# Altium PCB TX_RasPi_Ext_PCB1.PcbDoc
Units mm, origin at the board's own origin, x right, y up, seen from the top; angles counter-clockwise.
Board outline 65 x 57 mm, 2 copper layers (Top Layer, Bottom Layer); 25 components, 25 nets, 103 pads, 14 vias.
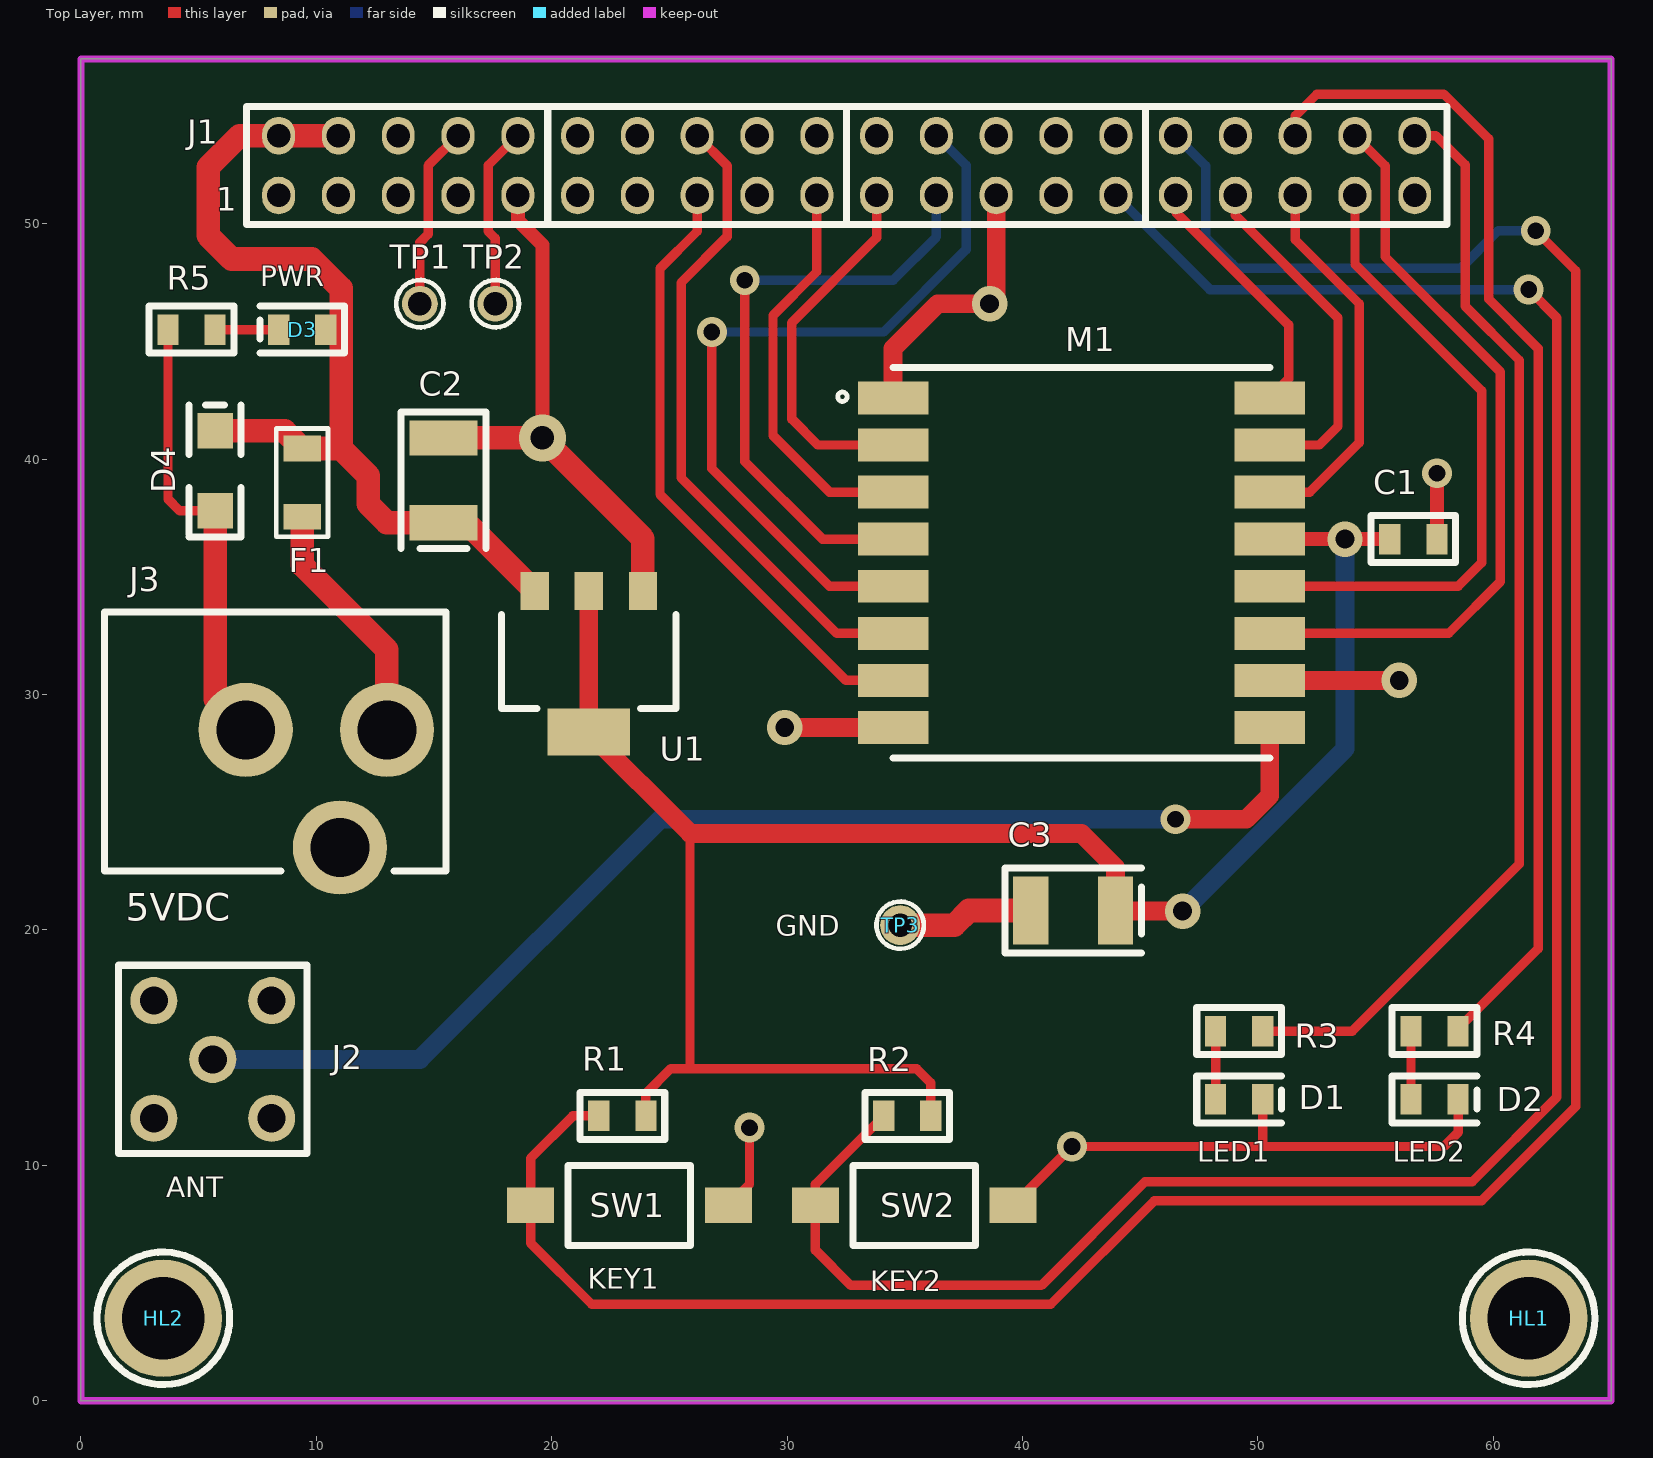
[diagram p0: Top Layer view]
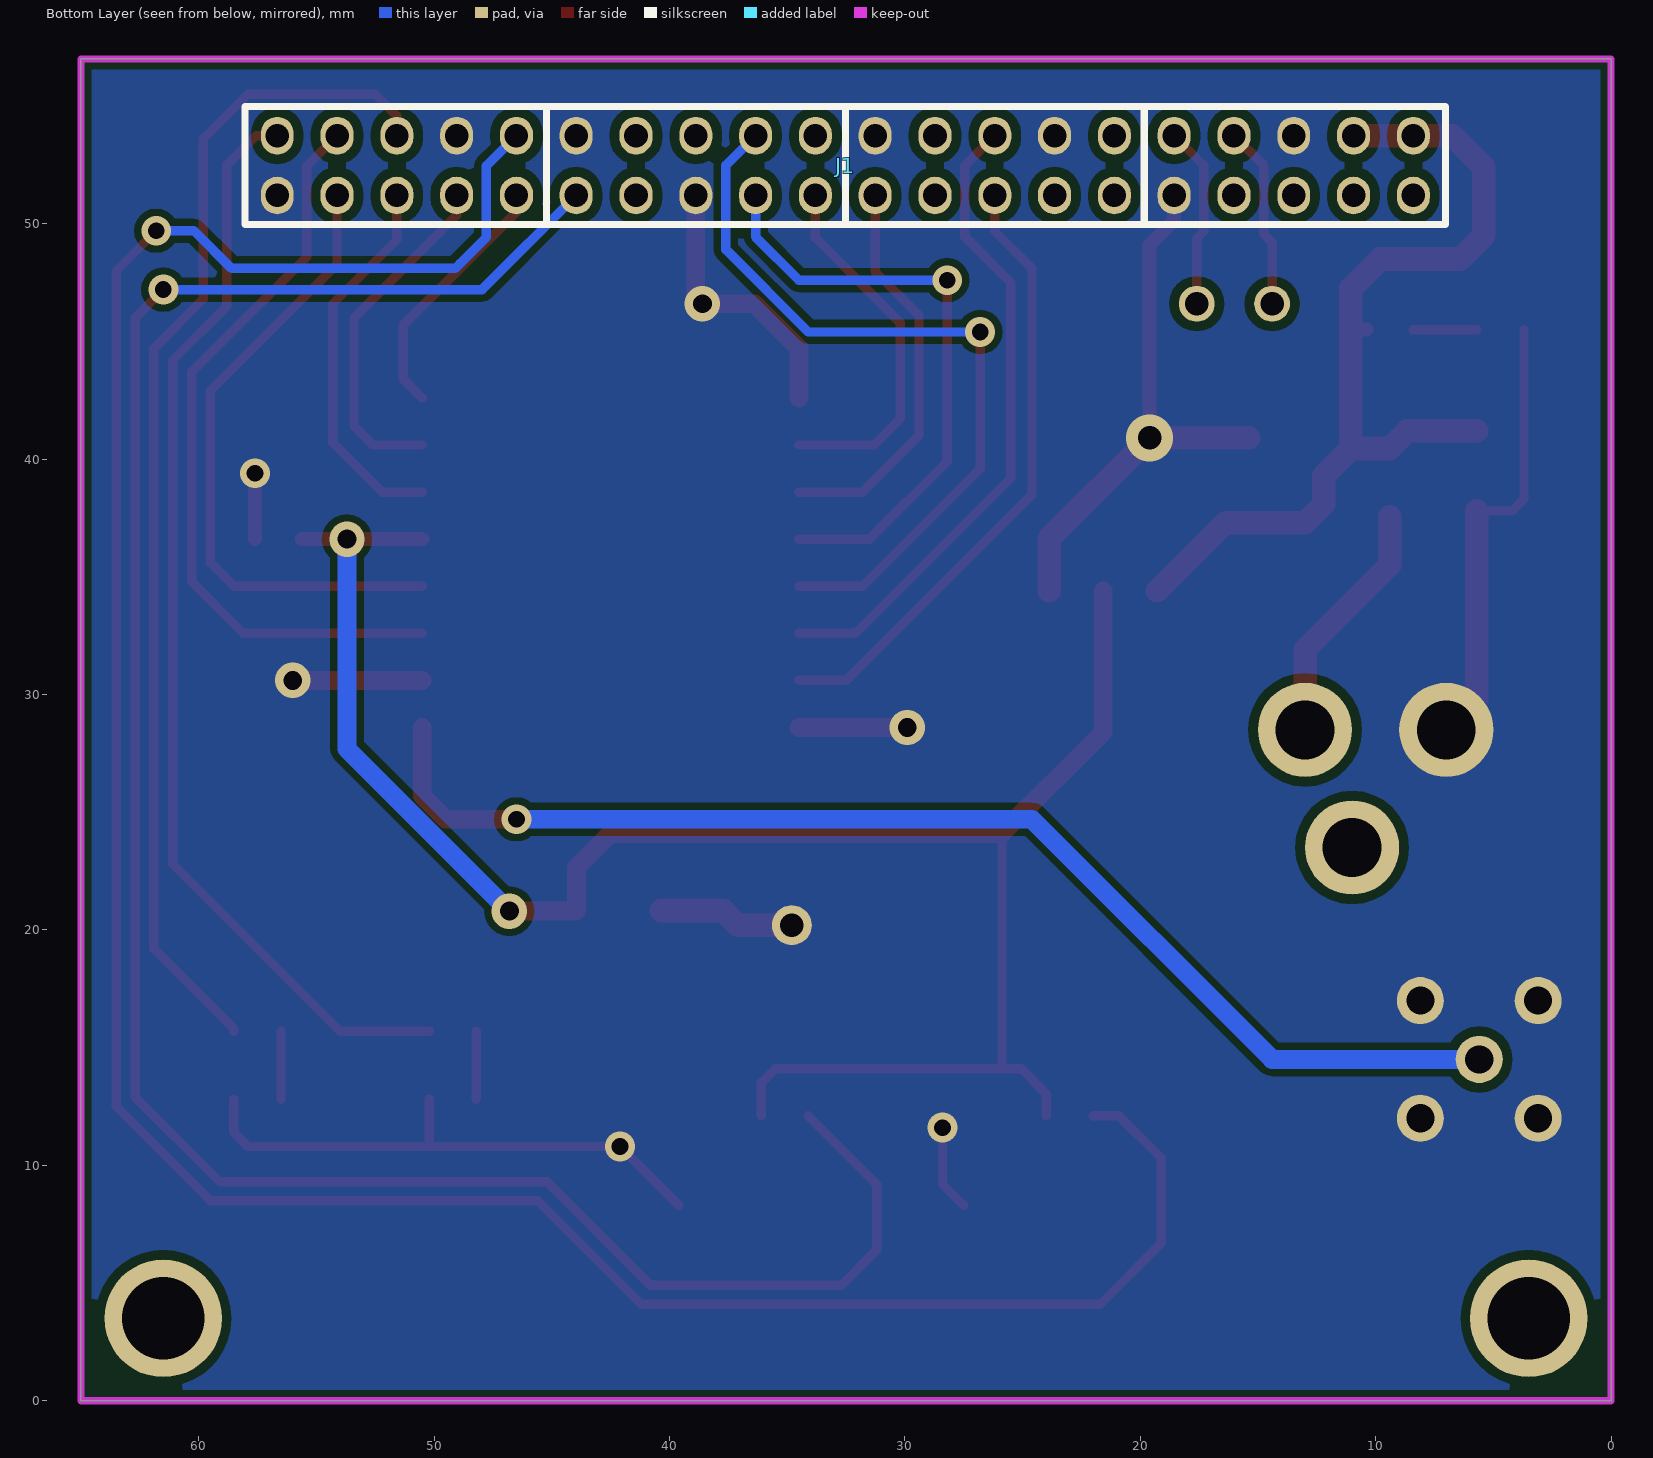
[diagram p1: Bottom Layer view, seen from below]
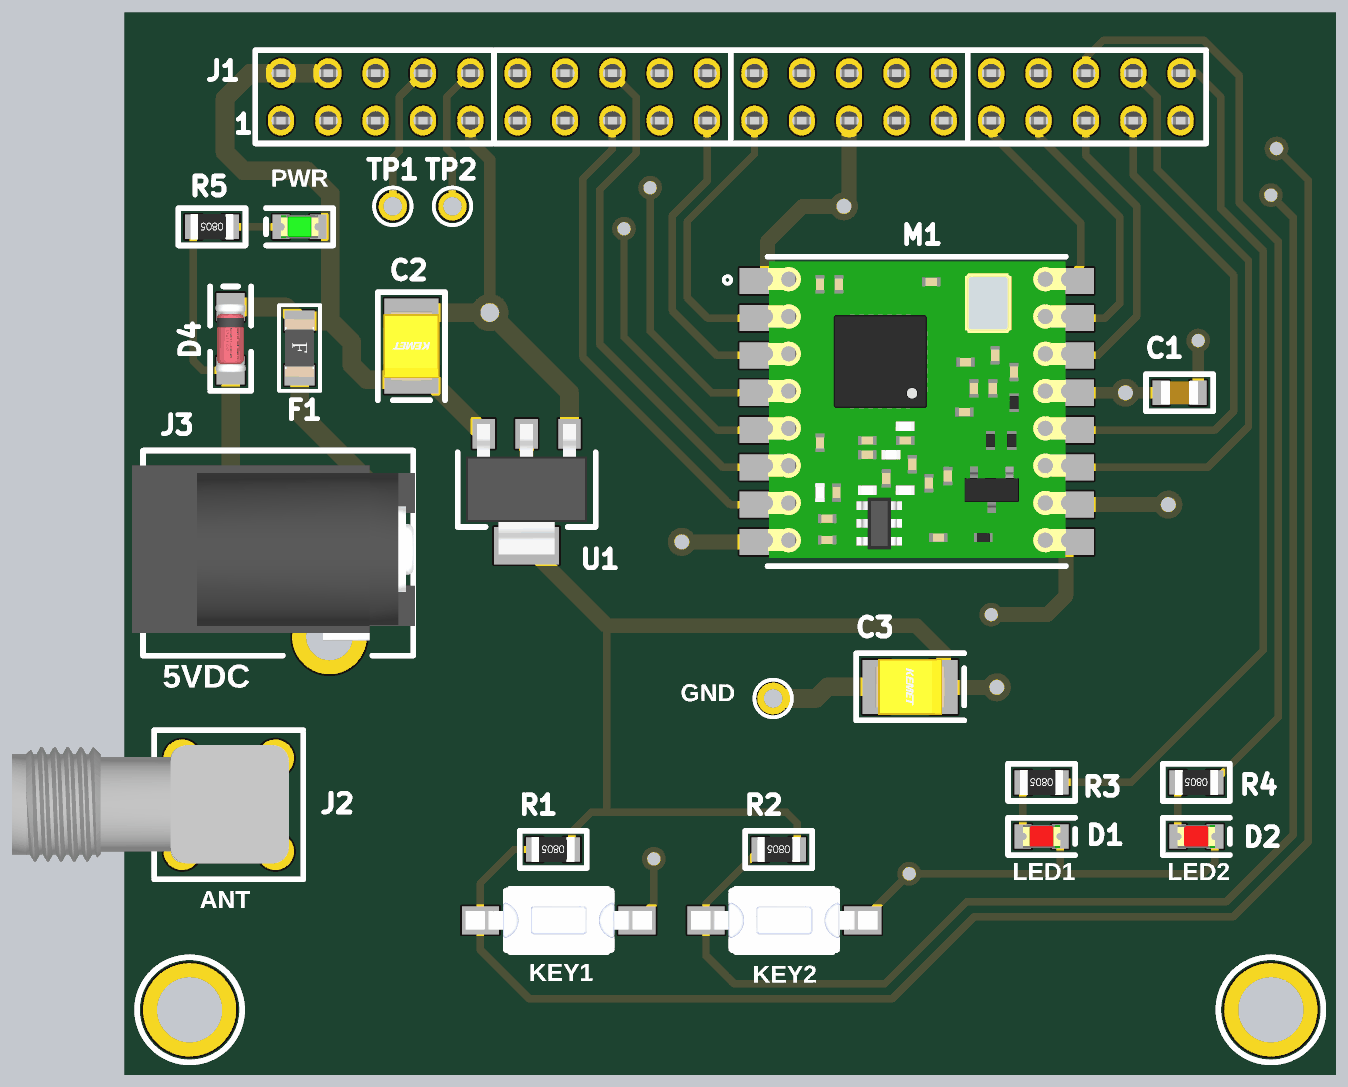
[diagram p2: 3D render of the assembled board from above, using the file's embedded part models]

## Layer stack, top to bottom
Top Solder: solder mask 0.0102, Solder Resist, Dk 3.5
Top Layer: signal copper 0.0356
Dielectric 1: dielectric 0.32, FR-4, Dk 4.8
Bottom Layer: signal copper 0.0356
Bottom Solder: solder mask 0.0102, Solder Resist, Dk 3.5

## Board outline
0,0 0,57 65,57 65,0

## Design rules (kind name [scope] priority, off if disabled: settings)
Clearance [All] p1: gap=0.3 ignorepadtopadclearanceinfootprint=TRUE except(0.25: Track-Track Track-SMDPad Track-Region SMDPad-Region; 0.4: SMDPad-Poly THPad-Poly Poly-Region)
ComponentClearance [All] p1: gap=-10 collisioncheckmode=3 verticalgap=2540 showdistances=FALSE
HoleSize [All] p1: absolutevalues=TRUE maxlimit=5 minlimit=0.5 maxpercent=80.000 minpercent=20.000
MinimumSolderMaskSliver [All] p1: minsoldermaskwidth=0.05
PlaneClearance [All] p1: clearance=0.1
PolygonConnect [All] p1: connectstyle=Direct reliefconductorwidth=0.4 reliefentries=4 polygonreliefangle="90 Angle" airgapwidth=0.254
RoutingVias [All] p1: holewidth=0.6 width=1.2 viastyle="Through Hole" minholewidth=0.5 minwidth=1 maxholewidth=1.5 maxwidth=2
SilkToSilkClearance [All] p1: silktosilkclearance=0.05
SilkToSolderMaskClearance [IsPad] p1: minsilkscreentomaskgap=0.05 clearancetoexposedcopper=TRUE
SolderMaskExpansion [All] p1: expansion=0.102 istentingtop=FALSE
UnRoutedNet [All] p1: checkbadconnections=TRUE
Width [All] p1: maxlimit=2 minlimit=0.25 preferedwidth=0.25
23 further rules are at their usual default settings.

## Components (designator, comment, footprint, x,y, rotation, side; value= is the part's Value field where it differs from the comment)
C1 "100nF" CAP_0805 56.6,36.6 r180 top
C2 "100uF" Cap_Tan_Size_B 15.4,39.1 r270 top
C3 "100uF" Cap_Tan_Size_B 42.15,20.825 r0 top
D1 "Red" LED_0805_Red 49.2,12.8 r0 top
D2 "Red" LED_0805_Red 57.5,12.8 r0 top
D3 "Green" LED_0805_Green 9.4,45.5 r180 top
D4 "zener 5.1v" LL4148 5.7,39.5 r90 top
F1 "Fuse SMD" fuse_1206 9.4,39 r270 top
HL1 "None" Holder_hole 61.5,3.5 r0 top
HL2 "None" Holder_hole 3.5,3.5 r0 top
J1 "Header2x20" Header_2x20_female 32.53,52.47 r0 bottom
J2 "SMA RF" SMA_RF_RIGHT 5.6,14.5 r270 top
J3 "Power Jack" power_jack_5mm 7,28.5 r270 top
M1 "RFM69" RFM95W 42.5,35.6 r0 top
R1 "10K" RES_0805 23,12.1 r180 top
R2 "10K" RES_0805 35.1,12.1 r180 top
R3 "3K3" RES_0805 49.2,15.7 r180 top
R4 "3K3" RES_0805 57.5,15.7 r180 top
R5 "3K3" RES_0805 4.7,45.5 r180 top
SW1 "Switch" Tact_SW_SMD 23.3,8.3 r180 top
SW2 "Switch" Tact_SW_SMD 35.4,8.3 r180 top
TP1 "TP" TP#1 14.4,46.6 r0 top
TP2 "TP" TP#1 17.6,46.6 r0 top
TP3 "TP" TP#2 34.8,20.2 r0 top
U1 "AMS1117 3.3V" AMS1117-SOT223 21.575,31.4 r180 top

## Footprints (in the part's own frame and the unit in brackets; to place one, negate y for a bottom-side part, rotate by r counter-clockwise, add the part's x,y. Pads: shape width x height; smd on the part's side, far side on the other; paste and mask are expansions set on the pad)
AMS1117-SOT223 [mm] "AMS1117 - SOT223"
  rect 1.2x1.6 smd mask+0.102: Gnd_Adj(-2.3,-3) In(2.3,-3) Out(0,-3)
  rect 3.5x2 smd mask+0.102: Out(0,3)
  Top Layer lines w0.8: 0,2.95 0,-3
  silkscreen extent -3.7,-2 3.7,2, body extent -3.25,-3.52 3.25,3.48, height 1.66
CAP_0805 [mm] "Capacitor SMD 0805"
  rect 0.9x1.3 smd mask+0.102: 1(-1,0)
  rect 0.9x1.3 smd: 2(1,0)
  silkscreen extent -1.8,-1 1.8,1, body extent -1,-0.62 1,0.63, height 1
Cap_Tan_Size_B [mm] "Capacitor Tantalium Size B"
  rect 1.5x2.9 smd: +(1.8,0)
  rect 1.5x2.9 smd mask+0.102: -(-1.8,0)
  silkscreen extent -2.9,-1.8 2.9,1.8, body extent -1.85,-1.5 1.85,1.5, height 2.11
fuse_1206 [mm] "Fuse SMD 1206"
  rect 1.1x1.6 smd: 1(-1.45,0) 2(1.45,0)
  silkscreen extent -2.3,-1.1 2.3,1.1, body extent -1.55,-0.77 1.55,0.78, height 0.61
Header_2x20_female [mm] "Header 2x20 Female, Pitch=2.54"
  oval 1.4x1.6 hole 1: 1(-24.13,1.27) 2(-24.13,-1.27) 3(-21.59,1.27) 4(-21.59,-1.27) 5(-19.05,1.27) 6(-19.05,-1.27) 7(-16.51,1.27) 8(-16.51,-1.27) 9(-13.97,1.27) 10(-13.97,-1.27) 11(-11.43,1.27) 12(-11.43,-1.27) 13(-8.89,1.27) 14(-8.89,-1.27) 15(-6.35,1.27) 16(-6.35,-1.27) 17(-3.81,1.27) 18(-3.81,-1.27) 19(-1.27,1.27) 20(-1.27,-1.27) 21(1.27,1.27) 22(1.27,-1.27) 23(3.81,1.27) 24(3.81,-1.27) 25(6.35,1.27) 26(6.35,-1.27) 27(8.89,1.27) 28(8.89,-1.27) 29(11.43,1.27) 30(11.43,-1.27) 31(13.97,1.27) 32(13.97,-1.27) 33(16.51,1.27) 34(16.51,-1.27) 35(19.05,1.27) 36(19.05,-1.27) 37(21.59,1.27) 38(21.59,-1.27) 39(24.13,1.27) 40(24.13,-1.27)
  silkscreen extent -25.5,-2.5 25.5,2.5, body extent -25.4,-2.54 25.4,2.54, height 8.5
Holder_hole [mm] "PCB Holder"
  round 5 hole 3.5: 1(0,0)
  silkscreen extent -2.81,-2.82 2.82,2.82
LED_0805_Green [mm] "LED SMD 0805 Green"
  rect 0.9x1.3 smd mask+0.102: 1(-1,0)
  rect 0.9x1.3 smd: 2(1,0)
  silkscreen extent -1.8,-1 1.8,1, body extent -1.01,-0.62 1.01,0.62, height 1.1
LED_0805_Red [mm] "LED SMD 0805 Red"
  rect 0.9x1.3 smd mask+0.102: 1(-1,0)
  rect 0.9x1.3 smd: 2(1,0)
  silkscreen extent -1.8,-1 1.8,1, body extent -1.01,-0.62 1.01,0.62, height 1.1
LL4148 [mm] "Diode SMD LL4148 1206"
  rect 1.5x1.5 smd paste+0 mask+0.102: A(-1.7,0) K(1.7,0)
  silkscreen extent -2.8,-1.1 2.8,1.1, body extent -1.82,-0.8 1.88,0.8, height 1.6
power_jack_5mm [mm] "power jack 5mm"
  round 4 hole 2.5: 1(0,0) 2(0,6) 3(5,4)
  silkscreen extent -5,-6 6,8.5, body extent -4.2,-6.6 5.2,8.6, height 11
RES_0805 [mm]
  rect 0.9x1.3 smd mask+0.102: 1(-1,0)
  rect 0.9x1.3 smd: 2(1,0)
  silkscreen extent -1.8,-1 1.8,1, body extent -1.15,-0.67 1.15,0.68, height 0.72
RFM95W [mm]
  rect 3x1.4 smd: 3V3(8,1) ANT(8,-7) DIO0(8,3) DIO1(8,5) DIO2(8,7) DIO3(8,-3) DIO4(8,-1) DIO5(-8,-5) GND(-8,-7) GND(-8,7) GND(8,-5) MISO(-8,5) MOSI(-8,3) NSS(-8,-1) RESET(-8,-3) SCK(-8,1)
  silkscreen extent -10.35,-8.3 8,8.3, body extent -7.98,-7.86 8.02,8.04, height 2.24
SMA_RF_RIGHT [mm] "SMA RF CONNECTOR"
  round 2 hole 1.2: 1(0,0) 2(2.5,-2.5) 3(2.5,2.5) 4(-2.5,2.5) 5(-2.5,-2.5)
  silkscreen extent -4,-4 4,4, body extent -3.2,-11.63 3.15,3.23, height 10.18
Tact_SW_SMD [mm] "Tact switch SMD 2-pin pitch 8mm"
  rect 2x1.5 smd mask+0.102: 1(-4.2,0)
  rect 2x1.5 smd: 2(4.2,0)
  silkscreen extent -2.6,-1.7 2.6,1.7, body extent -5,-1.75 5,1.75, height 4.31
TP#1 [mil] "Test Point"
  round 60 hole 39.37: 1(0,0)
  silkscreen extent -39,-40 40,40
TP#2 [mil] "Test Point"
  round 66.93 hole 39.37: 1(0,0)
  silkscreen extent -39,-40 40,40

## Part data
C1: library part Cap0805, "Capacitor SMD 0805"
C2 C3: library part Cap_Tant_B, "Capacitor SMD Tantalium Size B"
D1 D2: library part LED_0805_Red, "LED SMD 0805 Red"
D3: library part LED_0805_Green, "LED SMD 0805 Green"
D4: library part Diode_LL4148, "Diode SMD LL4148 1206"
F1: library part Fuse1206, "Fuse SMD 1206"
HL1 HL2: library part Holder_Hole, "PCB Holder Hole"
J1: "Pin Header 2x20 pitch=2.54mm"
J2: library part SMA_RF
J3: library part power_jack_5mm
M1: library part RFM95W-915S2, "General ISM < 1GHz LoRaâ„¢ Transceiver Module 915MHz Surface Mount", Package="SMD-16 RF Solutions", Availability=Unavailable, MF="RF Solutions", MP=RFM95W-915S2, Price=None, SnapEDA_Link=https://www.snapeda.com/parts/RFM95W-915S2/RF%20Solutions/view-part/585488/?ref=snap
R1 R2 R3 R4 R5: library part Res0805, "Resistor SMD 0805"
SW1 SW2: library part Tact_sw, "Tact switch SMD 2pin"
TP1 TP2 TP3: "Test point"
U1: library part AMS1117-SOT223, "AMS1117 Regulator 3.3V SMD SOT223"

## Via types
v1: diameter 1.27, hole 0.711, Top Layer to Bottom Layer, tented both sides, 8 vias
v2: diameter 1.5, hole 0.8, Top Layer to Bottom Layer, tented both sides, 5 vias
v3: diameter 2, hole 1, Top Layer to Bottom Layer, tented both sides, 1 vias

## Nets (pads, with @x,y where several pads share a name; then routed paths per layer and width w, separated by ;. In a path a pad name is that pad's centre, name@x,y a point inside that pad or via, vN(x,y) a via of type N, cw(c..) or ccw(c..) an arc to the next point about the centre after c; other vN are vias at no path point)
3v3: C1.2 C3.+ M1.3V3 R1.1 R2.1 U1.Out | length 78.3
  Top Layer w0.4: R1.1 24,13.05 25.05,14.1 25.9,14.1 ; 25.875,24.1 25.875,14.125 25.9,14.1 ; R2.1 36.1,13.5 35.5,14.1 25.9,14.1
  Top Layer w0.6: M1.3V3 v2(53.7,36.6) C1.2
  Top Layer w0.8: U1.Out@21.575,28.4 25.875,24.1 42.5,24.1 43.95,22.65 C3.+ 43.975,20.8 v2(46.8,20.8)
  Bottom Layer w0.8: v2(46.8,20.8) 53.7,27.7 v2(53.7,36.6)
5V: C2.+ D3.1 D4.K F1.1 J1.2 J1.4 U1.In | length 40.1
  Top Layer w0.6: D3.1 11.05,45.5
  Top Layer w1: D4.K 8.65,41.2 F1.1 11.05,40.45 ; J1.4 J1.2 6.74,53.74 5.4,52.4 5.4,49.5 6.4,48.5 9.8,48.5 11.05,47.25 11.05,45.5 11.05,40.45 ; U1.In 16.375,37.3 C2.+ 13,37.3 12.2,38.1 12.2,39.3 11.05,40.45
GND: C1.1 C2.- C3.- D1.2 D2.2 D4.A J1.6 J1.9 J1.14 J1.20 J1.25 J1.30 J1.34 J1.39 J2.2 J2.3 J2.4 J2.5 J3.1 M1.GND R5.2 SW1.1 SW2.1 TP3.1 U1.Gnd_Adj | length 100.1
  Top Layer w0.4: R5.2 3.7,38.3 4.2,37.8 D4.A ; SW1.1 28.4,9.2 v1(28.4,11.6) ; SW2.1 v1(42.1,10.8) 50.2,10.8 ; D1.2 50.2,10.8 ; D2.2 58.5,11.4 57.9,10.8 50.2,10.8
  Top Layer w0.6: J1.9 18.56,50.14 19.6,49.1 v3(19.6,40.9) ; C1.1 v1(57.6,39.4)
  Top Layer w0.8: v2(29.9,28.6) M1.GND@34.5,28.6 ; M1.GND@34.5,42.6 34.5,44.7 36.4,46.6 v2(38.6,46.6) 38.88,46.88 J1.25 ; M1.GND@50.5,30.6 v2(56,30.6)
  Top Layer w1: D4.A 5.7,29.8 J3.1 ; C2.- v3(19.6,40.9) 23.875,36.625 U1.Gnd_Adj ; TP3.1 37.1,20.2 37.725,20.825 C3.-
KEY1: J1.32 R1.2 SW1.2 | length 114.2
  Top Layer w0.4: R1.2 20.9,12.1 19.1,10.3 SW1.2 19.1,6.7 21.7,4.1 41.2,4.1 45.6,8.5 59.5,8.5 63.5,12.5 63.5,48 v1(61.8,49.7)
  Bottom Layer w0.4: J1.32 47.775,52.465 47.775,49.425 48.9,48.3 49.1,48.1 58.6,48.1 60.2,49.7 v1(61.8,49.7)
KEY2: J1.29 R2.2 SW2.2 | length 96.3
  Top Layer w0.4: R2.2 31.2,9.2 SW2.2 31.2,6.4 32.7,4.9 40.8,4.9 45.2,9.3 59.1,9.3 62.7,12.9 62.7,46 v1(61.5,47.2)
  Bottom Layer w0.4: J1.29 47.96,47.2 60.4,47.2 v1(61.5,47.2)
LED1: J1.40 R3.1 | length 47.1
  Top Layer w0.4: R3.1 54,15.7 61.1,22.8 61.1,44.2 58.8,46.5 58.8,52.5 57.56,53.74 J1.40
LED2: J1.36 R4.1 | length 50.4
  Top Layer w0.4: J1.36 51.58,54.58 52.5,55.5 57.9,55.5 59.8,53.6 59.8,46.8 61.9,44.7 61.9,19.2 58.5,15.8 R4.1
NetD1_1: D1.1 R3.2 | length 2.9
  Top Layer w0.4: D1.1 R3.2
NetD2_1: D2.1 R4.2 | length 2.9
  Top Layer w0.4: D2.1 R4.2
NetD3_2: D3.2 R5.1 | length 2.7
  Top Layer w0.4: R5.1 D3.2
NetF1_2: F1.2 J3.2 | length 10.5
  Top Layer w1: F1.2 9.4,35.5 13,31.9 J3.2
NetJ2_1: J2.1 M1.ANT | length 52.4
  Top Layer w0.8: v1(46.5,24.7) 49.5,24.7 50.5,25.7 M1.ANT
  Bottom Layer w0.8: J2.1 14.4,14.5 24.6,24.7 v1(46.5,24.7)
RFM_D0: J1.35 M1.DIO0 | length 16.3
  Top Layer w0.4: M1.DIO0 52.2,38.6 54.3,40.7 54.3,46.6 51.58,49.32 J1.35
RFM_D1: J1.33 M1.DIO1 | length 14.8
  Top Layer w0.4: J1.33 49.04,50.36 53.4,46 53.4,41.4 52.6,40.6 M1.DIO1
RFM_D2: J1.31 M1.DIO2 | length 10.9
  Top Layer w0.4: J1.31 46.5,50.5 51.3,45.7 51.3,43.4 M1.DIO2
RFM_D3: J1.38 M1.DIO3 | length 32.2
  Top Layer w0.4: M1.DIO3 58.1,32.6 60.3,34.8 60.3,43.7 55.4,48.6 55.4,52.46 J1.38
RFM_D4: J1.37 M1.DIO4 | length 27.2
  Top Layer w0.4: M1.DIO4 58.5,34.6 59.5,35.6 59.5,42.9 54.12,48.28 J1.37
RFM_D5: J1.15 M1.DIO5 | length 26.5
  Top Layer w0.4: J1.15 26.18,49.68 24.6,48.1 24.6,38.5 32.5,30.6 M1.DIO5
RFM_RST: J1.16 M1.RESET | length 27.6
  Top Layer w0.4: J1.16 27.45,52.47 27.45,49.45 25.5,47.5 25.5,39.2 32.1,32.6 M1.RESET
SPI_CS0: J1.24 M1.NSS | length 33.4
  Top Layer w0.4: v1(26.8,45.4) 26.8,39.6 31.8,34.6 M1.NSS
  Bottom Layer w0.4: v1@26.6,45.4 34.1,45.4 37.6,48.9 37.6,52.48 J1.24
SPI_MISO: J1.21 M1.MISO | length 15.7
  Top Layer w0.4: J1.21 33.8,49.4 30.2,45.8 30.2,41.7 31.3,40.6 M1.MISO
SPI_MOSI: J1.19 M1.MOSI | length 17.1
  Top Layer w0.4: J1.19 31.26,47.96 29.4,46.1 29.4,41 31.8,38.6 M1.MOSI
SPI_SCLK: J1.23 M1.SCK | length 26
  Top Layer w0.4: v1(28.2,47.6) 28.2,47.2 28.2,39.9 31.5,36.6 M1.SCK
  Bottom Layer w0.4: v1(28.2,47.6) 34.5,47.6 36.34,49.44 J1.23
TP1: J1.8 TP1.1 | length 7.8
  Top Layer w0.4: TP1.1 14.4,49.2 14.75,49.55 14.75,52.47 J1.8
TP2: J1.10 TP2.1 | length 7.8
  Top Layer w0.4: TP2.1 17.6,49.375 17.3,49.675 17.3,52.48 J1.10
pads on no net: HL1.1 HL2.1 J1.1 J1.3 J1.5 J1.7 J1.11 J1.12 J1.13 J1.17 J1.18 J1.22 J1.26 J1.27 J1.28 J3.3

## Polygon pours and split planes (outlines as drawn)
GND on Bottom Layer "gnd_BTM" (solid, remove dead copper, pour order 0): 0,57 65,57 65,0 0,0

## Keep-outs
Keep-Out Layer:
  the board outline again, w0.3

## Silkscreen, mask and mechanical layers (free items; w line width, h text height)
Top Overlay:
  text "PWR" at 7.625,47.05 h1.5
  text "5VDC" at 1.9,20 h2
  text "GND" at 29.525,19.45 h1.5
  text "LED1" at 47.425,9.85 h1.5
  text "LED2" at 55.725,9.85 h1.5
  text "ANT" at 3.625,8.35 h1.5
  text "KEY1" at 21.525,4.45 h1.5
  text "KEY2" at 33.525,4.35 h1.5

## Text inside footprints (layer, text, board x,y; h text height)
J1: Top Overlay "1" at 5.75,50.55 h1